# Altium PCB PCB_design.PcbDoc
Units mm, origin at the board's own origin, x right, y up, seen from the top; angles counter-clockwise.
Board outline 16 x 30 mm, 4 copper layers (SIG_TOP, GND, VCC, SIG_BOT), stack 1.586 mm thick; 56 components, 35 nets, 178 pads, 74 vias.
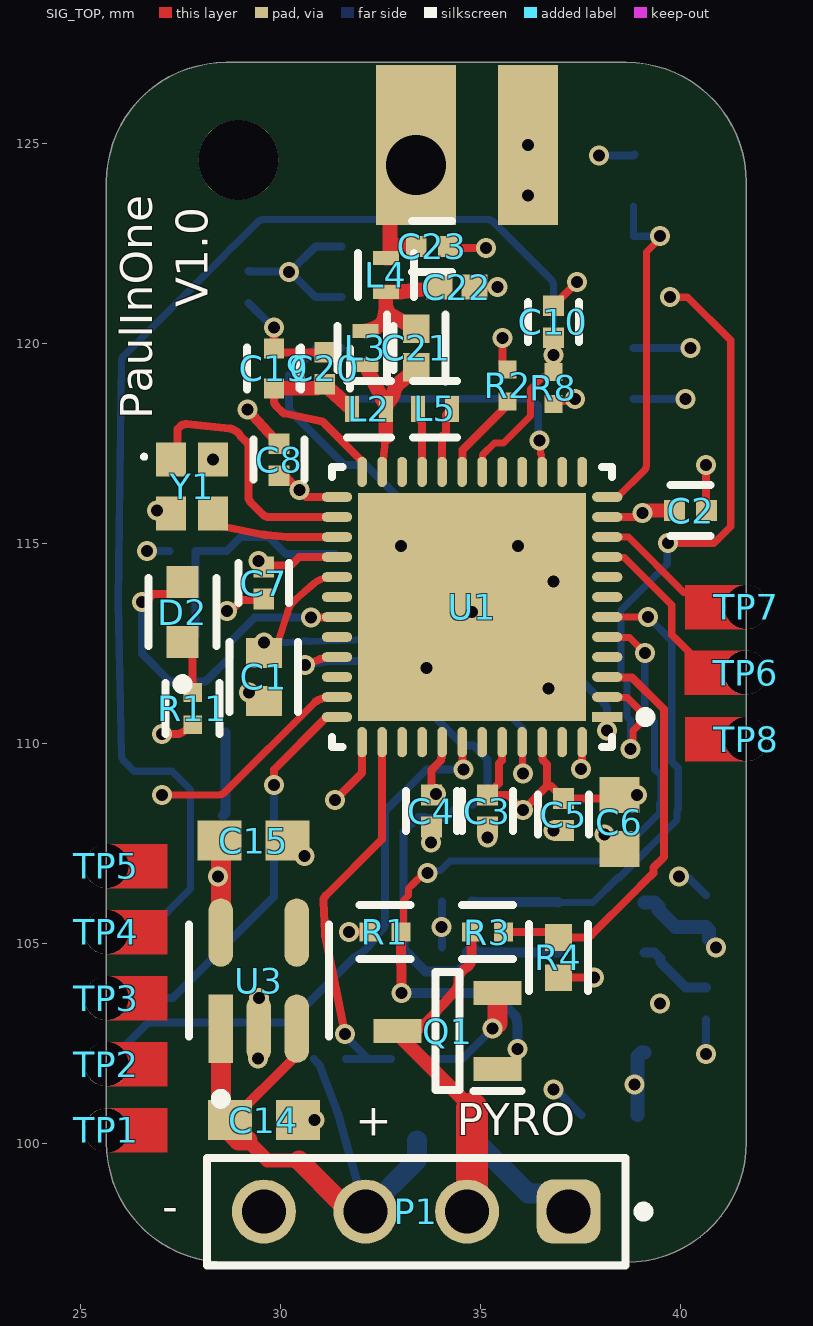
[diagram p0: SIG_TOP view]
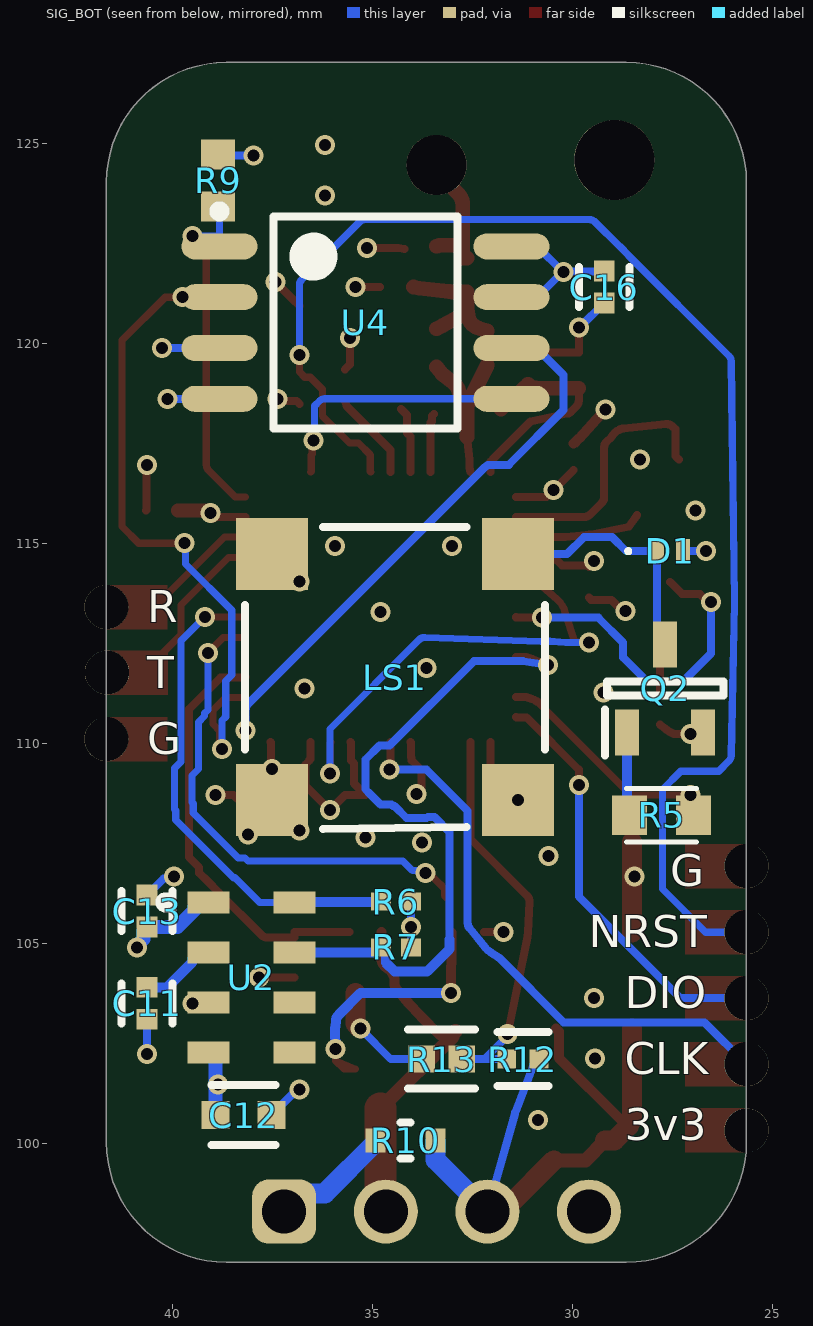
[diagram p1: SIG_BOT view, seen from below]
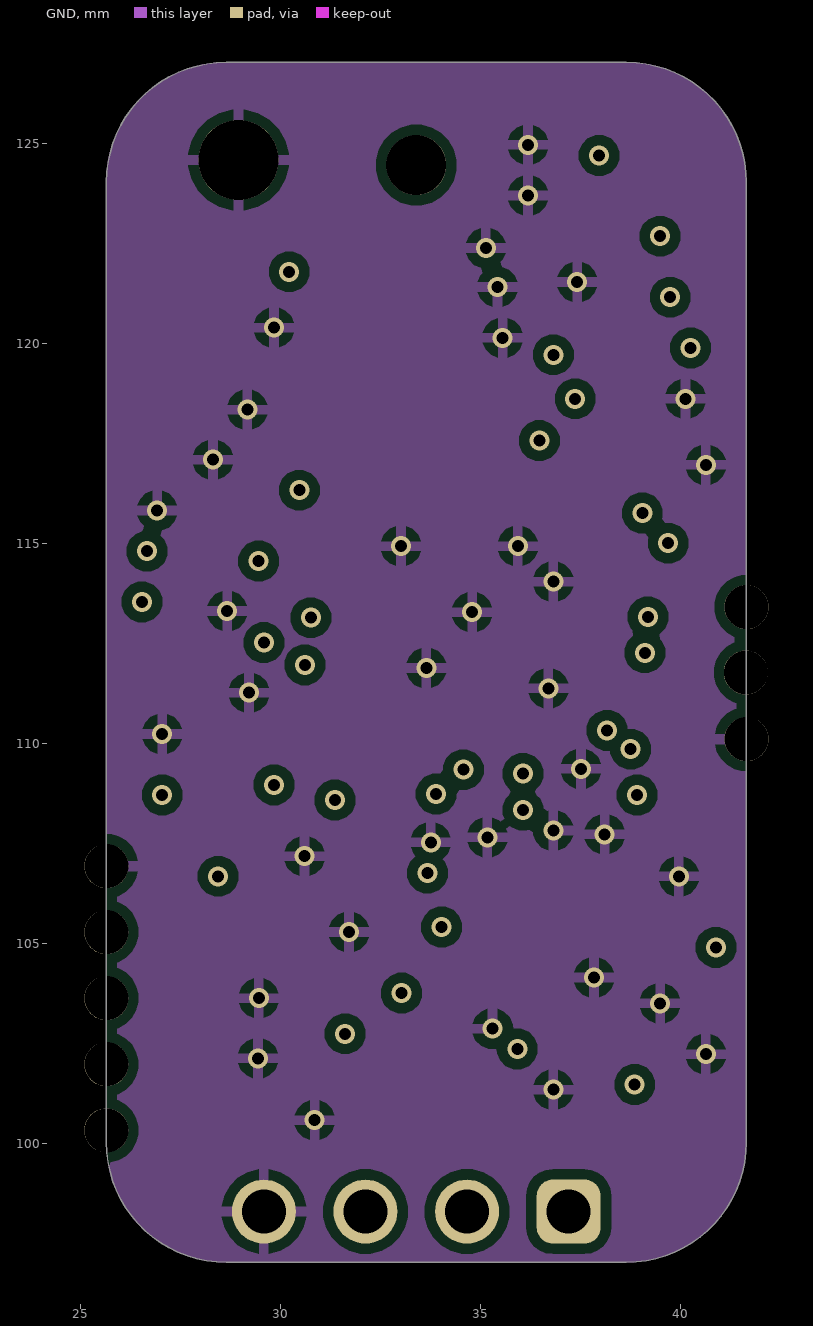
[diagram p2: GND]
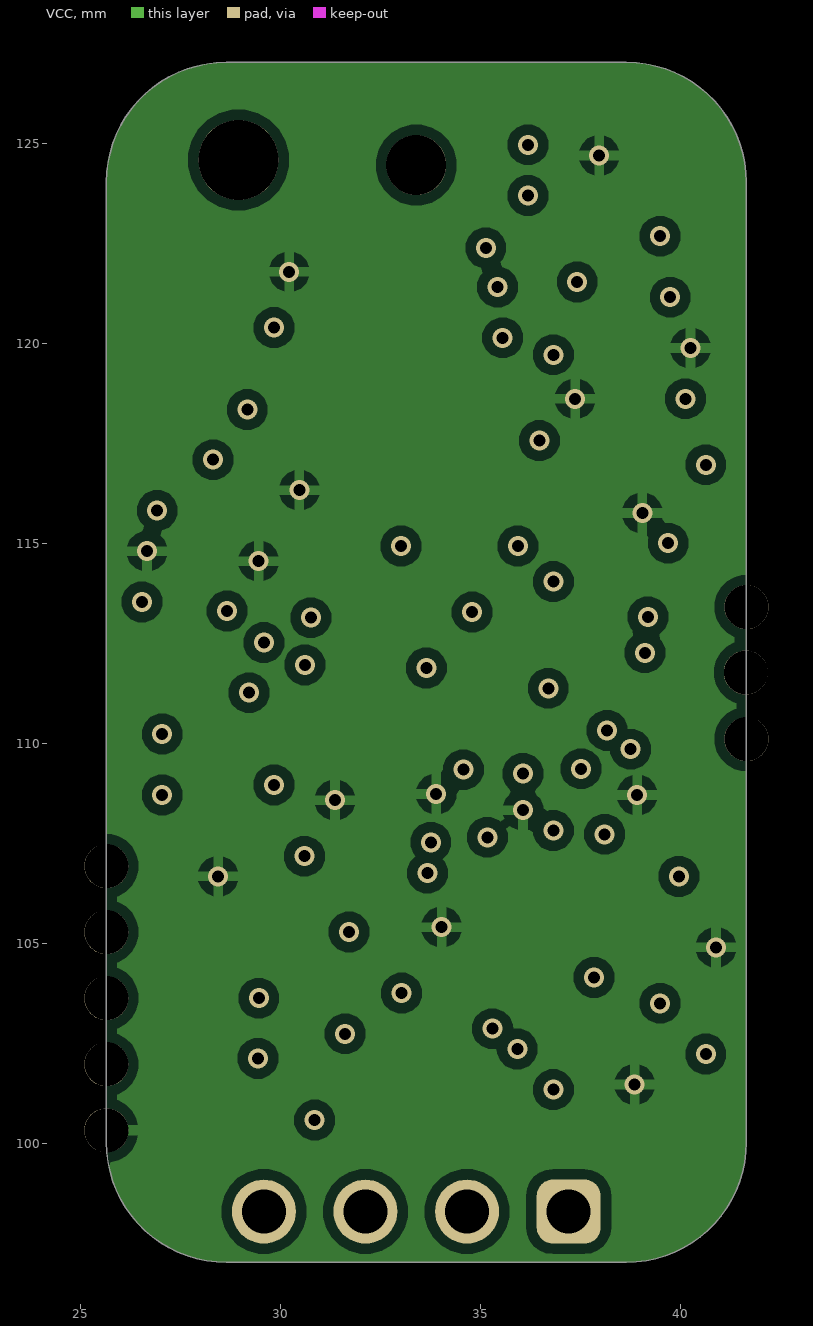
[diagram p3: VCC]
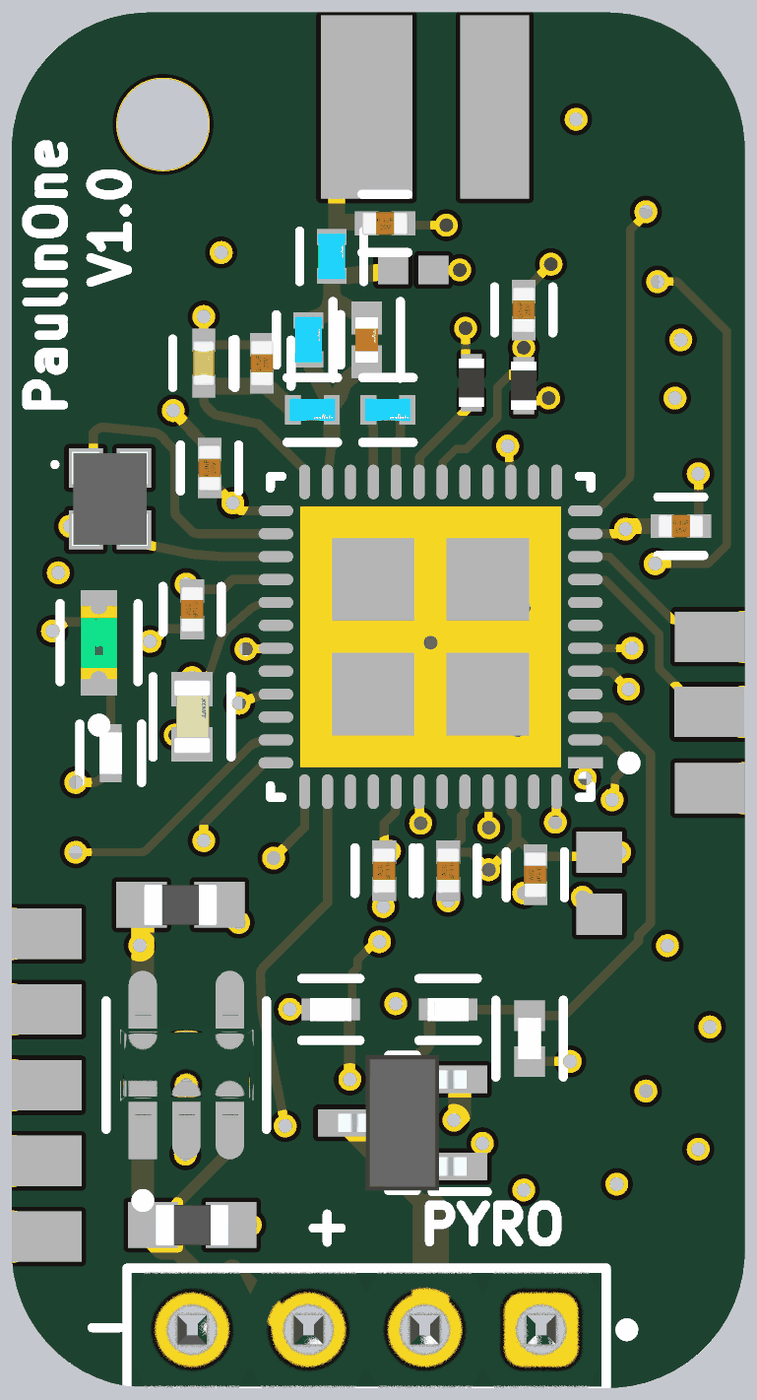
[diagram p4: 3D render of the assembled board from above, using the file's embedded part models]
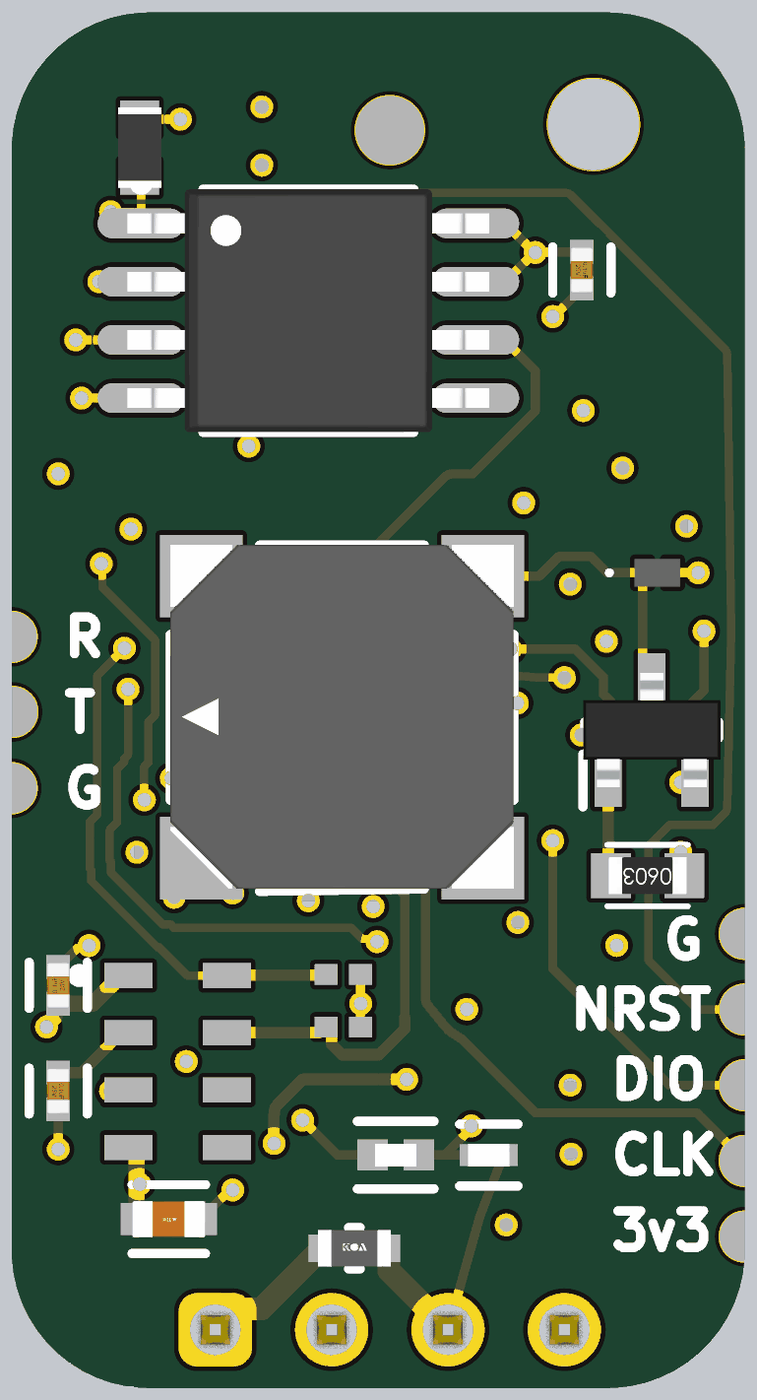
[diagram p5: 3D render of the assembled board from below, using the file's embedded part models]

## Layer stack, top to bottom
Top Solder: solder mask 0.0102, Solder Resist, Dk 3.5
SIG_TOP: signal copper 0.035
Dielectric 2: prepreg 0.2104, PP-006, Dk 4.4
GND: signal copper 0.0152
Dielectric 1: core 1.065, FR-4, Dk 4.6
VCC: signal copper 0.0152
Dielectric 3: prepreg 0.2104, PP-006, Dk 4.4
SIG_BOT: signal copper 0.035
Bottom Solder: solder mask 0.0102, Solder Resist, Dk 3.5

## Board outline
25.654,100.028 25.654,124.028 cw(c28.654,124.028) 28.654,127.028 38.654,127.028 cw(c38.654,124.028) 41.654,124.028 41.654,100.028 cw(c38.654,100.028) 38.654,97.028 28.654,97.028 cw(c28.654,100.028)

## Design rules (kind name [scope] priority, off if disabled: settings)
Clearance [All] p1: gap=0.254 ignorepadtopadclearanceinfootprint=TRUE
PolygonConnect [All] p1: connectstyle=Relief reliefconductorwidth=0.254 reliefentries=4 polygonreliefangle="90 Angle" airgapwidth=0.254
RoutingVias [All] p1: holewidth=0.3 width=0.5 viastyle="Through Hole" minholewidth=0.2 minwidth=0.3 maxholewidth=1 maxwidth=1
SolderMaskExpansion [All] p1: expansion=0.102 istentingtop=FALSE
SupplyNets "Schematic Supply Nets_3" [InNet('GND')] p1: voltage=0.000
SupplyNets "Schematic Supply Nets_1" [InNet('VBAT')] p2: voltage=0.000
SupplyNets "Schematic Supply Nets" [InNet('3v3')] p3: voltage=0.000
Width [All] p1: maxlimit=0.8 minlimit=0.15 preferedwidth=0.2 minimp=50.000000 maximp=50.000000 favimp=50.000000
30 further rules are at their usual default settings.

## Classes and differential pairs
component class MISC: C11 C12 C13 C16 D1 LS1 P1 Q1 Q2 R1 R3 R4 R5 R6 R7 R10 U2 U4
component class board: C1 C2 C3 C4 C5 C6 C7 C8 C10 C14 C15 C19 C20 C21 C22 C23 D2 L2 L3 L4 L5 R2 R8 R9 R11 R12 R13 TP1 TP2 TP3 TP4 TP5 TP6 TP7 TP8 U1 U3 Y1

## Components (designator, comment, footprint, x,y, rotation, side; value= is the part's Value field where it differs from the comment)
C1 "470nF" FP-C0603C-CF-MFG 29.591,111.668 r270 top value="0.47 μF"
C2 "0.1uF" FP-C0402-BB-MFG 40.259,115.824 r0 top value="0.10 μF"
C3 "0.1uF" FP-C0402-BB-MFG 35.179,108.312 r270 top value="0.10 μF"
C4 "0.1uF" FP-C0402-BB-MFG 33.782,108.312 r270 top value="0.10 μF"
C5 "0.1uF" FP-C0402-BB-MFG 37.084,108.223 r270 top value="0.10 μF"
C6 "4.7uF" CAPC1608X87X35NL15T15 38.481,108.037 r90 top
C7 "0.1uF" FP-C0402-BB-MFG 29.591,114.01 r270 top value="0.10 μF"
C8 "0.1uF" FP-C0402-BB-MFG 29.972,117.094 r90 top value="0.10 μF"
C10 "22nF" FP-C0402-BB-MFG 36.83,120.542 r90 top value="22,000 pF"
C11 "0.1uF" FP-C0402-BB-MFG 40.64,103.505 r270 bottom value="0.10 μF"
C12 "10uF" FP-C1608-080-0_1-MFG 38.227,100.711 r0 bottom
C13 "0.1uF" FP-C0402-BB-MFG 40.64,105.81 r90 bottom value="0.10 μF"
C14 "1uF" C0603 29.591,100.584 r180 top
C15 "1uF" C0603 29.337,107.569 r180 top
C16 "0.1uF" FP-C0402-BB-MFG 29.21,121.412 r270 bottom value="0.10 μF"
C19 "47nF" FP-CC0402-MFG 29.845,119.38 r90 top value="47 nF"
C20 "68pF" FP-C0402-BB-MFG 31.115,119.38 r90 top value="68 pF"
C21 "2.7pF" FP-GJM155-0_05-IPC_A 33.401,119.888 r90 top
C22 "15pF" CAPC1005X55X25NL05T10 34.417,121.412 r180 top
C23 "6.8pF" FP-C0402-BB-MFG 33.801,122.428 r0 top value="6.8 pF"
D1 "RB161QS-40T18R" RB161QS40T18R 27.559,114.808 r270 bottom
D2 "LTST-C190GKT" FP-LTST-C190GKT-MFG 27.559,113.284 r90 top
L2 "68nH" FP-LQW15AN_00-W0_5-0_1-MFG 32.214,118.364 r0 top
L3 "10nH" FP-LQW15AN_00-W0_6-0_1-MFG 32.131,119.888 r90 top
L4 "18nH" FP-LQW15AN_00-W0_6-0_1-MFG 32.639,121.71 r90 top
L5 "LQW15AN68NG00D" FP-LQW15AN_00-W0_5-0_1-MFG 33.865,118.364 r0 top
LS1 "CMT-7525-80-SMT-TR" CMT752580SMTTR 34.444,111.635 r0 bottom locked
P1 "61300411121" 61300411121 33.401,98.298 r180 top
Q1 "AO3400A" SOT95P280X125-3N 34.183,102.809 r180 top
Q2 "MMBT3904-TP" SOT95P237X125-3N 27.686,111.379 r90 bottom
R1 "CRCW0402100KFKED" FP-CRCW0402-e3-IPC_C 32.618,105.283 r0 top
R2 "ERJ2RKF1002X" RESC1005X40X25LL05T05 35.687,118.954 r90 top
R3 "CRCW0402100KFKED" FP-CRCW0402-e3-IPC_C 35.179,105.283 r180 top
R4 "CRCW040250K0FKED" FP-CRCW0402-e3-IPC_A 36.957,104.648 r90 top
R5 "ERJ-3EKF2000V" R0603 27.775,108.204 r0 bottom
R6 "RC0402JR-074K7L" RESC1005X40X25LL05T10 34.417,106.045 r180 bottom
R7 "RC0402JR-074K7L" RESC1005X40X25LL05T10 34.417,104.902 r180 bottom
R8 "ERJ2RKF1002X" RESC1005X40X25LL05T05 36.83,118.891 r270 top
R9 "ERJ3EKF1002V" RESC1609X55X30LL15T15 38.862,124.079 r90 bottom
R10 "0R" FP-RK73Z1J-MFG 34.175,100.076 r180 bottom
R11 "330Ω" FP-CRCW0402-e3-IPC_C 27.813,110.871 r90 top
R12 "CRCW0402100KFKED" FP-CRCW0402-e3-IPC_C 31.242,102.108 r180 bottom
R13 "CRCW040250K0FKED" FP-CRCW0402-e3-IPC_A 33.274,102.108 r180 bottom
TP1 "Castellated Hole" "Castellated Hole" 25.654,100.33 r180 top
TP2 "Castellated Hole" "Castellated Hole" 25.654,101.981 r180 top
TP3 "Castellated Hole" "Castellated Hole" 25.654,103.632 r180 top
TP4 "Castellated Hole" "Castellated Hole" 25.654,105.283 r180 top
TP5 "Castellated Hole" "Castellated Hole" 25.654,106.934 r180 top
TP6 "Castellated Hole" "Castellated Hole" 41.64,111.774 r0 top
TP7 "Castellated Hole" "Castellated Hole" 41.656,113.411 r0 top
TP8 "Castellated Hole" "Castellated Hole" 41.656,110.109 r0 top
U1 "STM32WLE5CCU6" FP-UFQFPN48-A0B9-IPC_C 34.798,113.411 r180 top locked
U2 "MPL3115A2" FRES-2153-01_V 38.032,104.15 r180 bottom
U3 "AP2112K-3.3TRG1" FP-SOT25-IPC_A 29.464,104.071 r90 top
U4 "MX25L3233FM2I-08G" MXIC-SOP-8_M 35.179,120.523 r180 bottom
Y1 "ECS-320-10-37B-CKY-TR" ECS3201037BCKYTR 27.796,116.419 r270 top

## Footprints (in the part's own frame and the unit in brackets; to place one, negate y for a bottom-side part, rotate by r counter-clockwise, add the part's x,y. Pads: shape width x height; smd on the part's side, far side on the other; paste and mask are expansions set on the pad)
61300411121 [mm] "Pin Header, pitch 2.54 mm, THT, Vertical, single row, 4p"
  rrect50% 1.6x1.6 hole 1.1: 1(-3.81,0)
  round 1.6 hole 1.1: 2(-1.27,0) 3(1.27,0) 4(3.81,0)
  silkscreen extent -5.8,-1.35 5.23,1.35, body extent -5.08,-1.27 5.08,1.27, height 8.57
C0603 [mm]
  rect 1.1x1 smd: 1(-0.85,0) 2(0.85,0)
  body extent -0.8,-0.44 0.8,0.46, height 0.78
CAPC1005X55X25NL05T10 [mm] "Chip Capacitor, 2-Leads, Body 1.00x0.50mm, IPC Medium Density"
  rect 0.66x0.62 smd: 1(-0.44,0) 2(0.44,0)
  body extent -0.53,-0.28 0.53,0.27, height 0.55
CAPC1608X87X35NL15T15 [mm] "Chip Capacitor, 2-Leads, Body 1.60x0.80mm, IPC Medium Density"
  rect 0.9x1 smd: 1(-0.675,0) 2(0.675,0)
  body extent -0.87,-0.48 0.87,0.47, height 0.87
"Castellated Hole" [mm]
  round 1.1 hole 1.1: 1(0,0)
  SIG_TOP region: -1.524,-0.55 0,-0.55 0,0.55 -1.524,0.55
CMT752580SMTTR [mm]
  rect 1.8x1.8 smd: 1(-3.075,3.05) 2(-3.075,-3.1) 3(3.075,-3.1) 4(3.075,3.05)
  silkscreen extent -3.75,-3.77 3.75,3.77, body extent -3.75,-3.78 3.75,3.72, height 2.5
ECS3201037BCKYTR [mm]
  rect 0.85x0.75 smd: 1(-0.675,-0.525) 2(0.675,-0.525) 3(0.675,0.525) 4(-0.675,0.525)
  silkscreen extent -0.8,-1.25 -0.7,-1.15, body extent -1.02,-0.82 1.02,0.82, height 0.6
FP-C0402-BB-MFG [mm]
  rect 0.52x0.52 smd paste+0 mask+0: 1(-0.4,0) 2(0.4,0)
  silkscreen extent -0.5,-0.64 0.5,0.64, body extent -0.8,-0.4 0.8,0.4, height 0.25
FP-C0603C-CF-MFG [mm]
  rect 0.75x0.9 smd paste+0 mask+0: 1(-0.6,0) 2(0.6,0)
  silkscreen extent -0.87,-0.85 0.88,0.85, body extent -1.2,-0.6 1.2,0.6, height 0.25
FP-C1608-080-0_1-MFG [mm]
  rect 0.7x0.7 smd paste+0 mask+0: 1(-0.7,0) 2(0.7,0)
  silkscreen extent -0.8,-0.75 0.8,0.75, body extent -0.8,-0.4 0.8,0.4, height 0.9
FP-CC0402-MFG [mm]
  rect 0.5x0.5 smd paste+0 mask+0: 1(-0.5,0) 2(0.5,0)
  silkscreen extent -0.53,-0.68 0.53,0.67, body extent -0.87,-0.48 0.87,0.48, height 0.25
FP-CRCW0402-e3-IPC_A [mm]
  rect 0.668x0.672 smd paste+0 mask+0: 1(-0.502,0) 2(0.502,0)
  silkscreen extent -0.84,-0.74 0.84,0.74, body extent -1.04,-0.54 1.04,0.54, height 0.25
FP-CRCW0402-e3-IPC_C [mm]
  rect 0.468x0.472 smd paste+0 mask+0: 1(-0.402,0) 2(0.402,0)
  silkscreen extent -0.64,-0.67 0.64,0.67, body extent -0.74,-0.38 0.74,0.38, height 0.25
FP-GJM155-0_05-IPC_A [mm]
  rect 0.715x0.672 smd paste+0 mask+0: 1(-0.479,0) 2(0.479,0)
  silkscreen extent -0.84,-0.74 0.84,0.74, body extent -1.04,-0.54 1.04,0.54, height 0.25
FP-LQW15AN_00-W0_5-0_1-MFG [mm]
  rect 0.35x0.65 smd paste+0 mask+0: 1(-0.425,0) 2(0.425,0)
  silkscreen extent -0.55,-0.71 0.55,0.7, body extent -0.7,-0.43 0.7,0.43, height 0.25
FP-LQW15AN_00-W0_6-0_1-MFG [mm]
  rect 0.35x0.65 smd paste+0 mask+0: 1(-0.425,0) 2(0.425,0)
  silkscreen extent -0.55,-0.7 0.55,0.7, body extent -0.7,-0.45 0.7,0.45, height 0.25
FP-LTST-C190GKT-MFG [mm]
  rect 0.8x0.8 smd paste+0 mask+0: 1(-0.75,0) 2(0.75,0)
  silkscreen extent -1.92,-0.85 0.85,0.85, body extent -1.25,-0.55 1.25,0.55, height 0.25
FP-RK73Z1J-MFG [mm]
  rect 0.5x0.6 smd paste+0 mask+0: 1(-0.75,0) 2(0.75,0)
  silkscreen extent -0.12,-0.45 0.12,0.45, body extent -0.8,-0.4 0.8,0.4, height 0.55
FP-SOT25-IPC_A [mm]
  rect 1.707x0.616 smd paste+0 mask+0: 1(-1.201,0.95)
  rrect100% 1.707x0.616 smd paste+0 mask+0: 2(-1.201,0) 3(-1.201,-0.95) 4(1.201,-0.95) 5(1.201,0.95)
  silkscreen extent -3.08,-1.75 1.4,1.75, body extent -2.55,-2 2.55,2, height 0.25
FP-UFQFPN48-A0B9-IPC_C [mm]
  rect 0.756x0.242 smd paste+0 mask+0: 1(-3.378,2.75)
  rrect100% 0.756x0.242 smd paste+0 mask+0: 2(-3.378,2.25) 3(-3.378,1.75) 4(-3.378,1.25) 5(-3.378,0.75) 6(-3.378,0.25) 7(-3.378,-0.25) 8(-3.378,-0.75) 9(-3.378,-1.25) 10(-3.378,-1.75) 11(-3.378,-2.25) 12(-3.378,-2.75) 25(3.378,-2.75) 26(3.378,-2.25) 27(3.378,-1.75) 28(3.378,-1.25) 29(3.378,-0.75) 30(3.378,-0.25) 31(3.378,0.25) 32(3.378,0.75) 33(3.378,1.25) 34(3.378,1.75) 35(3.378,2.25) 36(3.378,2.75)
  rrect100% 0.242x0.756 smd paste+0 mask+0: 13(-2.75,-3.378) 14(-2.25,-3.378) 15(-1.75,-3.378) 16(-1.25,-3.378) 17(-0.75,-3.378) 18(-0.25,-3.378) 19(0.25,-3.378) 20(0.75,-3.378) 21(1.25,-3.378) 22(1.75,-3.378) 23(2.25,-3.378) 24(2.75,-3.378) 37(2.75,3.378) 38(2.25,3.378) 39(1.75,3.378) 40(1.25,3.378) 41(0.75,3.378) 42(0.25,3.378) 43(-0.25,3.378) 44(-0.75,3.378) 45(-1.25,3.378) 46(-1.75,3.378) 47(-2.25,3.378) 48(-2.75,3.378)
  rect 5.7x5.7 smd paste-1000 mask+0: 49(0,0)
  silkscreen extent -4.46,-3.5 3.5,3.5
FRES-2153-01_V [mm] "LGA, 8-Leads, Body 5x3mm, Pitch 1.25mm"
  rect 1.05x0.55 smd: 1(-1.075,1.875) 2(-1.075,0.625) 3(-1.075,-0.625) 4(-1.075,-1.875) 5(1.075,-1.875) 6(1.075,-0.625) 7(1.075,0.625) 8(1.075,1.875)
  silkscreen extent -2.28,1.75 -2.03,2, body extent -1.5,-2.5 1.5,2.5, height 1.2
MXIC-SOP-8_M [mm] "SOP, 8-Leads, Body 5.4x5.3mm, Pitch 1.27mm, IPC Low Density"
  oval 1.9x0.65 smd: 1(-3.65,1.905) 2(-3.65,0.635) 3(-3.65,-0.635) 4(-3.65,-1.905) 5(3.65,-1.905) 6(3.65,-0.635) 7(3.65,0.635) 8(3.65,1.905)
  silkscreen extent -3.78,-2.65 2.3,2.9, body extent -3.95,-2.65 3.95,2.65, height 2.16
R0603 [mm] "Resistor, Chip; 0603, .022\" Height"
  rect 0.87x0.98 smd: 1(-0.8,0) 2(0.8,0)
  silkscreen extent -0.88,-0.67 0.88,0.67, body extent -0.85,-0.4 0.85,0.4, height 0.56
RB161QS40T18R [mm]
  rect 0.6x0.35 smd: 1(0,-0.325) 2(0,0.325)
  silkscreen extent -0.05,-1.1 0.05,-1, body extent -0.3,-0.5 0.3,0.5, height 0.34
RESC1005X40X25LL05T05 [mm] "Chip Resistor, 2-Leads, Body 1.05x0.55mm, IPC High Density"
  rect 0.45x0.45 smd: 1(-0.4,0) 2(0.4,0)
  body extent -0.53,-0.28 0.53,0.28, height 0.4
RESC1005X40X25LL05T10 [mm] "Chip Resistor, 2-Leads, Body 1.00x0.50mm, IPC High Density"
  rect 0.5x0.45 smd: 1(-0.375,0) 2(0.375,0)
  body extent -0.53,-0.27 0.53,0.28, height 0.4
RESC1609X55X30LL15T15 [mm] "Chip Resistor, 2-Leads, Body 1.75x0.95mm, IPC High Density"
  rect 0.75x0.85 smd: 1(-0.65,0) 2(0.65,0)
  body extent -0.87,-0.48 0.87,0.48, height 0.55
SOT95P237X125-3N [mm]
  rect 1.15x0.6 smd: 1(-1.1,0.95) 2(-1.1,-0.95) 3(1.1,0)
  silkscreen extent -1.68,-1.46 0.18,1.5, body extent -1.25,-1.5 1.25,1.5, height 1.07
SOT95P280X125-3N [mm]
  rect 1.2x0.6 smd: 1(-1.25,0.95) 2(-1.25,-0.95) 3(1.25,0)
  silkscreen extent -1.85,-1.48 0.3,1.5, body extent -1.4,-1.48 1.4,1.48, height 1.25

## Part data
C1: library part CMP-2006-03235-2, "CAP CER 0.47UF 16V X7R 0603", Capacitance="0.47 μF", Manufacturer=KEMET, Manufacturer Part Number=C0603C474K4RACTU, Package=C0603C-CF, Temperature="-55°C to +125°C", Temperature Characteristic=X7R, Temperature Coefficient=30ppm/°C, Temperature Range High=+125°C, Temperature Range Low=-55°C, Tolerance=0.1, Voltage Rating="16 V", Automotive=Yes, Automotive Grade="Grade 1", Category=Cap, ComponentLink2Description=Datasheet, ComponentLink2URL=https://api.kemet.com/component-edge/download/datasheet/C0603C100J5GACAUTO.pdf, Device Class L1="Passive Components", Device Class L2=Capacitors, Device Class L3="Ceramic Capacitors", Digikey Description="CAP CER 0.47UF 16V X7R 0603", Height=0.87mm, Lead Free=Yes, Material=Ceramic, Mouser Description="0603 C 470nF Ceramic Multilayer Capacitor, 16 V, +125degC, X7R Dielec, +/-10%", Octopart=https://octopart.com/c0603c474k4ractu-kemet-109683, RoHS=TRUE
C2 C3 C4 C5 C7 C8 C11 C13 C16: library part CMP-2008-02046-2, "CAP CER 0.1UF 10V X5R 0402", Capacitance="0.10 μF", Manufacturer=Kemet, Manufacturer Part Number=C0402C104K8PACTU, Package=C0402-BB, Temperature="-55°C to +125°C", Temperature Characteristic=X5R, Temperature Coefficient=15%, Temperature Range High=+125°C, Temperature Range Low=-55°C, Tolerance=0.1, Voltage Rating="10 V", Automotive=No, Category=Cap, ComponentLink2Description=Datasheet, ComponentLink2URL=https://content.kemet.com/datasheets/KEM_C1002_X7R_SMD.pdf, Device Class L1="Passive Components", Device Class L2=Capacitors, Device Class L3="Ceramic Capacitors", Digikey Description="CAP CER 0.1UF 10V X5R 0402", Height=0.55mm, Ipc Land Pattern Name=CAPC10050X50, Lead Free=Yes, Material=Ceramic, Mouser Description="Capacitor 100 nF 10 VDC 0402", Octopart=https://octopart.com/c0402c104k8pactu-kemet-140039, RoHS=TRUE
C6: library part CMP-2006-03238-1, Manufacturer=Kemet, Part Number=C0603C475K8PACTU
C10: library part CMP-2008-03151-2, "CAP CER 0.022UF 50V 10% X7R 0402", Capacitance="22,000 pF", Manufacturer=Kemet, Manufacturer Part Number=C0402C223K5RACTU, Package=C0402-BB, Temperature="-55°C to +125°C", Temperature Characteristic=X7R, Temperature Coefficient=15%, Temperature Range High=+125°C, Temperature Range Low=-55°C, Tolerance=0.1, Voltage Rating="50 V", Automotive=No, Category=Cap, ComponentLink2Description=Datasheet, ComponentLink2URL=https://content.kemet.com/datasheets/KEM_C1002_X7R_SMD.pdf, Device Class L1="Passive Components", Device Class L2=Capacitors, Device Class L3="Ceramic Capacitors", Digikey Description="CAP CER 0.022UF 50V 10% X7R 0402", Height=0.55mm, Ipc Land Pattern Name=CAPC10050X50, Lead Free=Yes, Material=Ceramic, Mouser Description="0402 C 22nF Ceramic Multilayer Capacitor, 50 V, +125degC, X7R Dielectric, +/-10%", Octopart=https://octopart.com/c0402c223k5ractu-kemet-99241, RoHS=TRUE
C12: library part CMP-2000-04979-3, "Multilayer Ceramic Capacitors 10μF ±10% 10V X5R SMD 0603", Case Code (Imperial)=0603, Case Code (Metric)=1608, Dielectric=X5R, Dielectric Material=Ceramic, Max Operating Temperature=85°C, Min Operating Temperature=-55°C, Package Quantity=1, Tolerance=10%, Voltage=10V, Capacitance=10uF, Case/Package=0603, Construction=Flat, Depth=0.8mm, Height=0.8mm, Lead Free="Lead Free", Length=1.6mm, Mount="Surface Mount", Number of Pins=2, Packaging="Tape and Reel", Radiation Hardening=No, REACH SVHC="No SVHC", Resistor Type=Ceramic, RoHS Compliant=Yes, Series=C, Termination=SMD/SMT, Thickness=0.035inch, Voltage Rating=10V, Voltage Rating (DC)=10V, Weight=7.1E-05oz, Width=0.8mm
C14 C15: library part CMP-00121-2, "CAP CER 1UF 50V X7R 0603", Design Item ID=CC0603KRX7R9BB105, Made By="Victor Gutierrez", Source=Capacitors.SchLib
C19: library part CMP-03422-000813-1, "CAP CER 0.047UF 25V X7R 0402", Capacitance="47 nF", Manufacturer=YAGEO, Manufacturer Part Number=CC0402KRX7R8BB473, Package=CC0402, Temperature="-55°C to +125°C", Temperature Characteristic=X7R, Temperature Coefficient=30ppm/°C, Temperature Range High=+125°C, Temperature Range Low=-55°C, Tolerance=0.1, Voltage Rating="25 V", Automotive=No, Automotive Grade=NA, Category=Cap, ComponentLink2Description=Datasheet, ComponentLink2URL=http://www.yageo.com/documents/recent/UPY-GP_NP0_16V-to-50V_16.pdf, Device Class L1="Passive Components", Device Class L2=Capacitors, Device Class L3="Ceramic Capacitors", Digikey Description="CAP CER 0.047UF 25V X7R 0402", Footprint Url=http://www.yageo.com/exep/pages/download/literatures/UPY-C_GEN_24.pdf, Height=0.55mm, Ipc Land Pattern Name=CAPC10050X50, Lead Free=Yes, Material=Ceramic, Mouser Description="Multilayer Ceramic Capacitors MLCC - SMD/SMT 47nF 25V X7R 10%", Octopart=https://octopart.com/cc0402krx7r8bb473-yageo-22850998, RoHS=TRUE
C20: library part CMP-1034-01170-4, "CAP CER 68PF 50V 5% NP0 0402", Capacitance="68 pF", Manufacturer=Kemet, Manufacturer Part Number=C0402C680J5GACTU, Package=C0402-BB, Temperature="-55°C to +125°C", Temperature Characteristic=C0G, Temperature Coefficient=15%, Temperature Range High=+125°C, Temperature Range Low=-55°C, Tolerance=0.05, Voltage Rating="50 V", Automotive=No, Category=Cap, ComponentLink2Description=Datasheet, ComponentLink2URL=https://content.kemet.com/datasheets/KEM_C1002_X7R_SMD.pdf, Device Class L1="Passive Components", Device Class L2=Capacitors, Device Class L3="Ceramic Capacitors", Digikey Description="CAP CER 68PF 50V 5% NP0 0402", Height=0.55mm, Ipc Land Pattern Name=CAPC10050X50, Lead Free=Yes, Material=Ceramic, Mouser Description="Multilayer Ceramic Capacitors MLCC - SMD/SMT 50volts 68pF C0G 5%", Octopart=https://octopart.com/c0402c680j5gactu-kemet-127205, RoHS=TRUE
C21: library part CMP-2008-03840-2, "Multi-Layer Ceramic Capacitor 2.7pF C0G  ±0.1pF 0402 Paper T/R", Case Code (Imperial)=0402, Case Code (Metric)=1005, Dielectric=C0G, Max Operating Temperature=125°C, Min Operating Temperature=-55°C, Package Quantity=10000, Temperature Coefficient=30ppm/°C, Voltage=50V, Capacitance=2.7pF, Case/Package=0402, Depth=0.5mm, Height=0.5mm, Lead Free="Lead Free", Lead Pitch=0.3mm, Length=1mm, Mount="Surface Mount", Number of Pins=2, Packaging="Tape and Reel", Radiation Hardening=No, REACH SVHC="No SVHC", Termination=SMD/SMT, Thickness=0.022inch, Voltage Rating=50V, Voltage Rating (DC)=50V, Width=0.02inch
C22: library part CMP-2008-04267-1, Manufacturer=Murata, Part Number=GRM1555C1H150JZ01D
C23: library part CMP-1034-00517-3, "CAP CER 6.8PF 50V NP0 0402", Capacitance="6.8 pF", Manufacturer=Kemet, Manufacturer Part Number=C0402C689C5GACTU, Package=C0402-BB, Temperature="-55°C to +125°C", Temperature Characteristic=C0G, Temperature Coefficient=15%, Temperature Range High=+125°C, Temperature Range Low=-55°C, Tolerance="0.25 pF", Voltage Rating="50 V", Automotive=No, Category=Cap, ComponentLink2Description=Datasheet, ComponentLink2URL=https://content.kemet.com/datasheets/KEM_C1002_X7R_SMD.pdf, Device Class L1="Passive Components", Device Class L2=Capacitors, Device Class L3="Ceramic Capacitors", Digikey Description="CAP CER 6.8PF 50V NP0 0402", Height=0.55mm, Ipc Land Pattern Name=CAPC10050X50, Lead Free=Yes, Material=Ceramic, Mouser Description="Cap Ceramic 6.8pF 50V C0G 0.25pF SMD 0402 125°C Paper T/R", Octopart=https://octopart.com/c0402c689c5gactu-kemet-9143567, RoHS=TRUE
D1: "Schottky Diode", Manufacturer_Name="ROHM Semiconductor", Mouser Part Number=755-RB161QS-40T18R, Datasheet Link=http://rohmfs.rohm.com/en/products/databook/datasheet/discrete/diode/schottky_barrier/rb161qs-40-e.pdf, Height=0.24mm, Manufacturer_Part_Number=RB161QS-40T18R, Mouser Price/Stock=https://www.mouser.co.uk/ProductDetail/ROHM-Semiconductor/RB161QS-40T18R?qs=r%2Fl4stf1ffr06ghBFd2HSg%3D%3D
D2: library part CMP-22017-000005-2, "LED GREEN CLEAR CHIP SMD", Case Code (Imperial)=0603, Case Code (Metric)=1608, Color=Green, Forward Current=30mA, Forward Voltage=2.1V, Lens Color=Colorless, Max Operating Temperature=85°C, Min Operating Temperature=-55°C, Package Quantity=1, Power Dissipation=100mW, Reverse Voltage=5V, Test Current=10mA, Voltage=2V, Case/Package=0603, Depth=0.8mm, Dominant Wavelength=569nm, Height=0.8mm, Illumination Color=Green, Lead Free="Lead Free", Length=1.6mm, Lens Style=Clear, Lens Transparency=Clear, Luminous Intensity=6mcd, Mount="Surface Mount", Number of Elements=1, Number of LEDs=1, Number of Pins=2, Packaging="Tape and Reel", Power Rating=100mW, Radiation Hardening=No, Viewing Angle=130°, Wavelength=565nm, Width=0.8mm
L2: library part CMP-06042-005746-1, "Wire Wound RF Inductor 68nH ±2% 140mA 1.96Ω 0402 (1005)", Case Code (Imperial)=0402, Case Code (Metric)=1005, Current=570mA, Current Rating=140mA, DC Resistance (DCR)=1.96R, Inductance Tolerance=2%, Max Operating Temperature=125°C, Min Operating Temperature=-55°C, Package Quantity=10000, Self Resonant Frequency=2.5GHz, Test Frequency=100MHz, Case/Package=0402, Core Material=Air, DC Current=140mA, Depth=0.6mm, Height=0.5mm, Inductance=68nH, Lead Free="Lead Free", Length=1mm, Max DC Current=140mA, Military Standard=Not, Mount="Surface Mount", Number of Pins=2, Packaging="Tape and Reel", Q Factor=20, Radiation Hardening=No, REACH SVHC="No SVHC", Shielding=Unshielded, Termination=SMD/SMT, Tolerance=2%, Weight=2.8E-05oz, Width=0.5mm
L3: library part CMP-06042-002082-1, "Wire Wound RF Inductor 10nH ±2% 500mA 0.17Ω 0402 (1005)", Case Code (Imperial)=0402, Case Code (Metric)=1005, Current=370mA, Current Rating=500mA, DC Resistance (DCR)=170mR, Inductance Tolerance=2%, Max Operating Temperature=125°C, Min Operating Temperature=-55°C, Package Quantity=10000, Resistor Type=Wirewound, Self Resonant Frequency=5.5GHz, Test Frequency=100MHz, Case/Package=0402, Core Material=Non-Magnetic, DC Current=500mA, Depth=0.7mm, Height=0.5mm, Height - Seated (Max)=0.024inch, Inductance=10nH, Lead Free="Lead Free", Length=1mm, Max DC Current=500mA, Military Standard=Not, Mount="Surface Mount", Number of Pins=2, Packaging="Tape and Reel", Radiation Hardening=No, REACH SVHC="No SVHC", Shielding=Unshielded, Termination=SMD/SMT, Tolerance=2%, Weight=2.8E-05oz, Width=0.02inch
L4: library part CMP-06042-006916-1, "Wire Wound RF Inductor 18nH ±5% 370mA 0.27Ω 0402 (1005)", Case Code (Imperial)=0402, Case Code (Metric)=1005, Current Rating=370mA, DC Resistance (DCR)=270mR, Max Operating Temperature=125°C, Min Operating Temperature=-55°C, Package Quantity=10000, Resistor Type=Wirewound, Self Resonant Frequency=4.5GHz, Test Frequency=100MHz, Tolerance=5%, Case/Package=0402, Core Material=Air, DC Current=370mA, Depth=0.7mm, Height=0.5mm, Inductance=18nH, Lead Free="Lead Free", Length=1mm, Max DC Current=370mA, Military Standard=Not, Mount="Surface Mount", Packaging="Tape and Reel", Q Factor=25, Radiation Hardening=No, Shielding=Unshielded, Termination=SMD/SMT, Weight=2.8E-05oz, Width=0.02inch
L5: library part CMP-06042-005746-1, "Wire Wound RF Inductor 68nH ±2% 140mA 1.96Ω 0402 (1005)", Case Code (Imperial)=0402, Case Code (Metric)=1005, Current=570mA, Current Rating=140mA, DC Resistance (DCR)=1.96R, Inductance=68nH, Inductance Tolerance=2%, Max Operating Temperature=125°C, Min Operating Temperature=-55°C, Package Quantity=10000, Self Resonant Frequency=2.5GHz, Test Frequency=100MHz, Case/Package=0402, Core Material=Air, DC Current=140mA, Depth=0.6mm, Height=0.5mm, Lead Free="Lead Free", Length=1mm, Max DC Current=140mA, Military Standard=Not, Mount="Surface Mount", Number of Pins=2, Packaging="Tape and Reel", Q Factor=20, Radiation Hardening=No, REACH SVHC="No SVHC", Shielding=Unshielded, Termination=SMD/SMT, Tolerance=2%, Weight=2.8E-05oz, Width=0.5mm
LS1: "Loudspeaker or Buzzer", Manufacturer_Name="CUI Devices", Mouser Part Number=490-CMT-7525-80SMTTR, Arrow Part Number=CMT-7525-80-SMT-TR, Arrow Price/Stock=https://www.arrow.com/en/products/cmt-7525-80-smt-tr/cui-devices?region=nac, Datasheet Link=https://www.cuidevices.com/product/resource/cmt-7525-80-smt-tr.pdf, Height=2.7mm, Manufacturer_Part_Number=CMT-7525-80-SMT-TR, Mouser Price/Stock=https://www.mouser.co.uk/ProductDetail/CUI-Devices/CMT-7525-80-SMT-TR?qs=P1JMDcb91o5izP7Xira9ww%3D%3D
P1: library part CMP-1502-01064-3, Color=Black, Contact Resistance=20mΩ, Current Rating=3A, Max Operating Temperature=105°C, Min Operating Temperature=-40°C, Operating Supply Voltage=250V, Connector Type="Male Pin", Contact Material=Copper, Contact Mating Length=5.9944mm, Contact Plating=Gold, Gender=Male, Height=8.89mm, Lead Free="Lead Free", Lead Pitch=2.54mm, Mount="Through Hole", NexarPartId=32855522, Number of Contacts=4, Number of Pins=4, Number of Positions=4, Number of Rows=1, Orientation=Vertical, Packaging=Bulk, Pitch=2.54mm, REACH SVHC=Unknown, RoHS=Compliant, Termination=Solder, Voltage Rating=250V
Q1: "MOSFET (N-Channel)", Manufacturer_Name="Alpha & Omega Semiconductors", Arrow Part Number=AO3400A, Arrow Price/Stock=https://www.arrow.com/en/products/ao3400a/alpha-and-omega-semiconductor?utm_currency=USD&region=nac, Datasheet Link=http://aosmd.com/res/data_sheets/AO3400A.pdf, Height=1.25mm, Manufacturer_Part_Number=AO3400A
Q2: "Transistor BJT NPN", Manufacturer_Name=MCC, Mouser Part Number=833-MMBT3904-TP, Arrow Part Number=MMBT3904-TP, Arrow Price/Stock=https://www.arrow.com/en/products/mmbt3904-tp/micro-commercial-components?region=nac, Datasheet Link=https://mccsemi.com/pdf/Products/MMBT3904(SOT-23).pdf, Height=1.25mm, Manufacturer_Part_Number=MMBT3904-TP, Mouser Price/Stock=https://www.mouser.co.uk/ProductDetail/Micro-Commercial-Components-MCC/MMBT3904-TP?qs=KFo7JewZbUHicjDjIayULQ%3D%3D
R1 R3 R12: library part CMP-2002-08123-3, "RES Thick Film, 100kΩ, 1%, 0.063W, 100ppm/°C, 0402", Case Code (Imperial)=0402, Case Code (Metric)=1005, Max Operating Temperature=155°C, Max Power Dissipation=63mW, Min Operating Temperature=-55°C, Package Quantity=10000, Resistance=100kR, Temperature Coefficient=100ppm/°C, Tolerance=1%, Voltage Rating=50V, Case/Package=0402, Composition="Thick Film", Contact Plating=Tin, Depth=0.5mm, Features="Automotive AEC-Q200", Height=0.35mm, Lead Free="Lead Free", Length=1mm, Military Standard=Not, Mount="Surface Mount", Number of Pins=2, Number of Terminations=2, Packaging="Tape and Reel", Power Rating=63mW, Radiation Hardening=No, Termination=SMD/SMT, Voltage Rating (DC)=50V, Weight=2.3E-05oz, Width=0.02inch
R2 R8: library part CMP-2000-07588-1, "Chip Resistor, 10 KOhm, +/- 1%, 0.1 W, -55 to 155 degC, 0402 (1005 Metric), RoHS, Tape and Reel", Case Code (Imperial)=0402, Case Code (Metric)=1005, Manufacturer=Panasonic, Max Operating Temperature=155degC, Max Power Dissipation=100mW, Min Operating Temperature=-55degC, Package Description="2-Pin Surface Mount Device, Body 1 x 0.5 mm", Package Quantity=1, Package Reference=402, Resistance=10KOhm, Temperature Coefficient=100ppm\/degreesC, Tolerance=1%, Voltage Rating=50V, Case\/Package=0402, Composition=ThickFilm, Contact Plating=Tin, Datasheet URL=https://industrial.panasonic.com/cdbs/www-data/pdf/RDA0000/AOA0000C304.pdf, Datasheet Version=02/2017, Depth=0.5mm, Height=0.35mm, Lead Free=LeadFree, Length=1mm, Manufacturer URL=http://www.panasonic.com/, Military Standard=Not, Mount=SurfaceMount, Mounting Technology=SurfaceMount, Number of Pins=2, Number of Terminations=2, Packaging=TapeandReel, Power Rating=100mW, Radiation Hardening=No, REACH SVHC=NoSVHC, RoHSCompliant=True, Termination=SMD/SMT, Voltage Rating (DC)=50V, Width=0.02inch
R4 R13: library part CMP-02407-005152-1, "RES Thick Film, 50kΩ, 1%, 0.063W, 100ppm/°C, 0402", Case Code (Imperial)=0402, Case Code (Metric)=1005, Max Operating Temperature=155°C, Min Operating Temperature=-55°C, Package Quantity=10000, Power Rating=63mW, Resistance=50kR, Tolerance=1%, Voltage Rating=50V, Case/Package=0402, Height=0.35mm, Lead Free="Lead Free", Length=1mm, Packaging="Tape and Reel", Termination=SMD/SMT, Weight=2.3E-05oz, Width=0.5mm
R5: library part CMP-024-000031-1, "200 OHM 1% 1/10W 0603", Design Item ID=ERJ-3EKF2000V, Made By="Brennan Swanton", Source=Resistors.SchLib
R6 R7: library part CMP-2002-08011-1, Manufacturer="Yageo / Phycomp", Part Number=RC0402JR-074K7L
R9: library part CMP-1012-00623-3, "Chip Resistor, 10 KOhm, +/- 1%, 0.1 W, -55 to 155 degC, 0603 (1608 Metric), RoHS, Tape and Reel", Case Code (Imperial)=0603, Case Code (Metric)=1608, Manufacturer=Panasonic, Max Operating Temperature=155degC, Max Power Dissipation=100mW, Min Operating Temperature=-55degC, Package Description="2-Pin Surface Mount Device, Body 1.6 x 0.85 mm", Package Quantity=1, Package Reference=603, Resistance=10KOhm, Temperature Coefficient=100ppm\/degreesC, Tolerance=1%, Voltage Rating=75V, Case\/Package=0603, Composition=ThickFilm, Contact Plating=Tin, Datasheet URL=https://industrial.panasonic.com/cdbs/www-data/pdf/RDA0000/AOA0000C304.pdf, Datasheet Version=02/2017, Depth=0.8mm, Height=0.45mm, Lead Free=LeadFree, Length=1.6mm, Manufacturer URL=http://www.panasonic.com/, Military Standard=Not, Mount=SurfaceMount, Mounting Technology=SurfaceMount, Number of Pins=2, Number of Terminations=2, Packaging=TapeandReel, Power Rating=100mW, Radiation Hardening=No, REACH SVHC=NoSVHC, RoHSCompliant=true, Termination=SMD/SMT, Voltage Rating (DC)=75V, Width=0.031inch
R10: library part CMP-2000-01769-2, "RES 0 OHM JUMPER 0603", Case Code (Imperial)=0603, Case Code (Metric)=1608, Max Operating Temperature=155°C, Min Operating Temperature=-55°C, Package Quantity=5000, Power Rating=1W, Resistance=0mR, Resistor Type="Thick Film", Temperature Coefficient=400ppm/°C, Tolerance=1%, Case/Package=0603, Construction=Rectangular, Depth=0.8mm, Height=0.45mm, Lead Free="Lead Free", Length=1.6mm, Military Standard=Not, Packaging="Tape and Reel", RoHS Compliant=Yes, Series=RK73Z, Termination=SMD/SMT, Width=0.8mm
R11: library part CMP-2002-08122-2, "RES Thick Film, 0Ω, 0.063W, 0402", Case Code (Imperial)=0402, Case Code (Metric)=1005, Max Operating Temperature=155°C, Max Power Dissipation=63mW, Min Operating Temperature=-55°C, Package Quantity=1, Resistance=0mR, Temperature Coefficient=100ppm/°C, Tolerance=5%, Voltage Rating=50V, Case/Package=0402, Composition="Thick Film", Contact Plating=Tin, Depth=0.5mm, Features="Automotive AEC-Q200", Height=0.35mm, Lead Free="Lead Free", Length=1mm, Military Standard=Not, Mount="Surface Mount", Number of Terminations=2, Packaging="Tape and Reel", Power Rating=63mW, Radiation Hardening=No, Termination=SMD/SMT, Voltage Rating (DC)=50V, Weight=2.3E-05oz, Width=0.5mm
TP1 TP2 TP3 TP4 TP5 TP6 TP7 TP8: library part CMP-00124-3, "Castellated Hole, 1 connection"
U1: library part CMP-12105-000100-1, "MULTIPROTOCOL LPWAN 32-BIT ARM C"
U2: library part CMP-1261-00002-2, "Xtrinsic I2C Precision Altimeter, 1.95 to 3.6 V, -40 to 85 degC, 8-Pin LGA (2153-01), RoHS, Tray", Manufacturer="Freescale Semiconductor", Operating Temperature Range="-40 to 85 degC", ComponentLink1Description="Manufacturer URL", ComponentLink1URL=http://www.freescale.com/, ComponentLink2Description=Datasheet, ComponentLink2URL=http://cache.freescale.com/files/sensors/doc/data_sheet/MPL3115A2.pdf, ComponentLink3Description="Package Specification", ComponentLink3URL=http://cache.freescale.com/files/shared/doc/package_info/98ASA00260D.pdf, DatasheetVersion="Rev. 3.0", fSCL@20 pF="4 MHz Max.", fSCL@400 pF="400 KHz Max.", Mounting Technology="Surface Mount", PackageDescription="8-Pin Land Grid Array, Body 5 x 3 mm, Pitch 1.25 mm", PackageVersion="Rev. O", Packing=Tray, PartNumber=MPL3115A2, RoHS=TRUE, VDD="1.95 to 3.6 V", VDDIO="1.62 to 3.6 V"
U3: library part CMP-12756-000035-1, "IC REG LINEAR 3.3V 600MA SOT25", Case/Package=SOT-23-5, Dropout Voltage=250mV, Max Input Voltage=6V, Max Operating Temperature=85°C, Max Output Current=600mA, Min Input Voltage=2.5V, Min Operating Temperature=-40°C, Output Voltage=3.3V, Package Quantity=1, Quiescent Current=55uA, Accuracy=1.5%, Height=1.3mm, Lead Free="Lead Free", Length=3.1mm, Mount="Surface Mount", Number of Outputs=1, Number of Pins=5, Number of Regulators=1, Output Current=600mA, Output Type=Fixed, Packaging="Tape and Reel", Polarity=Positive, Width=1.7mm
U4: library part CMP-2000-05278-1, "CMOS MXSMIO(R) (Serial Multi I/O) Flash Memory, 32 Mbits (x1/x2/x4), 3 V, -40 to 85 degC, 8-Pin SOP", Manufacturer=Macronix, Package Description="8-Pin Small Outline Package, Body 5.23 x 5.28 mm, Pitch 1.27 mm", Package Reference=SOP-8, Datasheet URL=http://datasheet.octopart.com/MX25L3233FM2I-08G-Macronix-datasheet-38883555.pdf, Datasheet Version="Rev. 1.1, 01/2015", Manufacturer URL=http://www.macronix.com
Y1: "Crystal or Oscillator", Manufacturer_Name=ECS, Mouser Part Number=520-320-10-37B-CKYT, Arrow Part Number=ECS-320-10-37B-CKY-TR, Arrow Price/Stock=https://www.arrow.com/en/products/ecs-320-10-37b-cky-tr/ecs-international?region=nac, Datasheet Link=https://ecsxtal.com/store/pdf/ECX-1637B.pdf, Height=0.5mm, Manufacturer_Part_Number=ECS-320-10-37B-CKY-TR, Mouser Price/Stock=https://www.mouser.co.uk/ProductDetail/ECS/ECS-320-10-37B-CKY-TR?qs=l7cgNqFNU1gltxVt%2FwcX%252Bw%3D%3D

## Free pads (board coordinates)
  round 1.5 hole 1.5: 30(33.401,124.46)
  rect 2x4 smd: 31(33.401,124.968)
  rect 1.5x4 smd: 31(36.195,124.968)
  round 2 hole 2: 33(28.956,124.587)

## Via types
v1: diameter 0.5, hole 0.3, SIG_TOP to SIG_BOT, 74 vias

## Nets (pads, with @x,y where several pads share a name; then routed paths per layer and width w, separated by ;. In a path a pad name is that pad's centre, name@x,y a point inside that pad or via, vN(x,y) a via of type N, cw(c..) or ccw(c..) an arc to the next point about the centre after c; other vN are vias at no path point)
3v3: C2.1 C3.1 C4.1 C5.1 C6.2 C7.1 C8.1 C12.2 C13.1 C15.2 C16.1 D1.2 LS1.1 R6.2 R7.2 R8.2 R9.2 TP1.1 U1.11 U1.25 U1.28 U1.37 U1.41 U1.44 U1.46 U2.1 U2.4 U3.5 U4.3 U4.7 U4.8 | length 31
  SIG_TOP w0.2: v1(29.461,114.56) 29.461,114.54 C7.1 29.627,114.446 30.26,114.446 30.475,114.661 U1.28 ; C8.1@29.972,116.84 v1(30.48,116.332) 30.651,116.161 U1.25 ; v1(31.369,108.585) 32.048,109.264 U1.37 ; v1(33.898,108.736) 33.782,108.853 33.782,109.338 34.023,109.579 34.023,109.642 34.04,109.659 34.04,110.025 U1.41 ; U1.44 35.54,110.025 35.54,109.58 35.464,109.504 35.464,108.997 C3.1 35.687,108.712 v1(36.068,108.331) 36.672,108.935 ; U1.46 36.556,110.025 36.556,109.614 36.573,109.597 36.573,109.579 36.672,109.48 36.672,108.935 ; R8.2 36.9,118.561 37.318,118.561 v1(37.375,118.618) ; U1.11 38.953,115.661 v1@38.989,115.697 ; v1(38.923,108.712) C6.2 38.392,108.623 C5.1 36.772,108.935 36.672,108.935
  SIG_TOP w0.25: C15.2 C15.2@28.514,107.542
  SIG_TOP w0.35: v1@38.989,115.697 39.116,115.824 C2.1
  SIG_TOP w0.5: U3.5 C15.2@28.514,107.542
  SIG_BOT w0.2: v1(26.67,114.808) D1.2 ; C16.1 29.219,121.802 30.217,121.802 v1(30.226,121.793) v1@30.247,121.793 ; U4.7 30.882,121.158 v1@30.247,121.793 ; U4.8 30.882,122.428 v1@30.247,121.793 ; R7.2 34.039,104.905 34.039,105.407 v1(34.036,105.41) 34.039,105.413 34.039,106.042 R6.2 ; v1(37.973,124.699) 38.832,124.699 R9.2 ; U4.3 v1(40.259,119.888)
  SIG_BOT w0.35: C12.2 38.927,102.175 39.027,102.275 U2.4 ; U2.1 39.357,106.025 39.457,105.925 39.457,105.832 39.879,105.41 C13.1 40.725,105.325 40.725,105.112 40.894,104.943 v1(40.894,104.902)
  other v1: 38.862,101.473 28.448,106.68 39.052,115.76
antenna: C23.1 L4.2 pad.30 pad.31@33.401,124.968 | length 3.8
  SIG_TOP w0.369: L4.2 32.738,122.135 32.747,122.144 32.747,122.456 ; C23.1 33.325,122.456 32.747,122.456 ; pad.31@33.401,124.968 pad.30 cw(c33.032,124.46) 33.3,124.206 32.848,123.73 ccw(c33.116,123.476) 32.747,123.476 32.747,122.456
BAR_SCL: R6.1 U1.6 U2.8 | length 12.4
  SIG_TOP w0.18: U1.6 U1.6 39.193,113.162 v1(39.194,113.163)
  SIG_BOT w0.18: U2.8 37.821,106.025 38.44,106.644 38.478,106.644 39.919,108.085 39.919,108.321 39.951,108.353 39.951,109.38 39.788,109.543 39.788,112.569 v1(39.194,113.163)
  SIG_BOT w0.25: R6.1 34.802,106.035 36.947,106.035 U2.8
BAR_SDA: R7.1 U1.33 U2.7 | length 17.2
  SIG_TOP w0.2: v1(30.617,111.965) 30.998,112.107 cw(c31.163,111.661) 31.015,112.113 31.163,112.161 U1.33
  SIG_BOT w0.2: v1(30.617,111.965) 31.238,112.056 cw(c31.267,111.858) 31.267,112.058 32.468,112.058 34.577,109.949 34.83,109.949 35.184,109.595 35.184,108.858 35.067,108.741 34.804,108.478 34.529,108.478 34.49,108.439 34.455,108.439 34.149,108.132 33.648,108.132 33.621,108.159 33.455,108.159 33.077,107.781 33.077,105.099
  SIG_BOT w0.25: 33.077,105.099 33.077,104.856 33.635,104.298 34.449,104.298 34.671,104.52 34.671,104.802 34.771,104.902 R7.1 34.817,104.902 34.944,104.775 35.95,104.775 U2.7
BAT_VAL: R12.1 R13.2 U1.38 | length 9.9
  SIG_TOP w0.2: 31.114,105.273 ccw(c31.314,105.282) 31.116,105.252 31.125,105.195 ccw(c31.722,105.288) 31.13,105.167 v1(31.623,102.743) ; 31.114,105.274 31.08,106.045 cw(c31.28,106.054) 31.138,106.195 32.548,107.605 U1.38
  SIG_BOT w0.2: v1(31.623,102.743) 31.623,102.693 32.208,102.108 ; R12.1 32.208,102.108 ; R13.2 32.208,102.108
BUZZER: R5.1 U1.35 | length 5.3
  SIG_TOP w0.18: v1@27.054,108.715 28.475,108.715 ccw(c28.475,108.895) 28.601,108.767 30.88,111.046
  SIG_TOP w0.2: 30.88,111.046 ccw(c30.841,111.139) 30.897,111.055 cw(c31.163,110.661) 31.015,111.113 31.163,111.161 U1.35
  other v1: 27.051,108.712
CONTINUITY: R3.1 R4.2 U1.3 | length 10.4
  SIG_TOP w0.2: R3.1 R4.2@36.957,105.283 ; R4.2 37.637,105.15 ccw(c37.637,105.35) 37.778,105.208 38.853,106.283 39.128,106.559 39.335,106.765 39.335,106.899 39.593,107.157 39.593,110.858 38.798,111.653 38.184,111.653 U1.3
GND: C1.2 C2.2 C3.2 C4.2 C5.2 C6.1 C7.2 C8.2 C10.2 C11.2 C12.1 C13.2 C14.1 C15.1 C16.2 C19.2 C20.2 C22.1 C23.2 LS1.3 LS1.4 P1.4 pad.31@36.195,124.968 pad.33 Q1.2 Q2.2 R1.1 R2.2 R4.1 R11.1 R13.1 TP5.1 TP8.1 U1.48 U1.49 U2.3 U3.2 U4.4 Y1.2 Y1.4 | length 19.1
  SIG_TOP w0.2: v1(27.051,110.236) 27.429,110.236 ccw(c27.429,110.436) 27.543,110.271 27.677,110.363 R11.1 ; v1(28.673,113.313) 28.754,113.313 29.031,113.589 29.534,113.589 C7.2@29.591,113.646 ; v1(29.845,120.396) C19.2 29.845,119.78 C20.2 ; v1(31.722,105.288) 32.082,105.288 R1.1 ; C23.2@34.201,122.366 34.361,122.389 v1(35.14,122.389) ; C22.1@34.817,121.412 C22.1 v1(35.433,121.412) ; v1(35.56,120.142) 35.56,119.597 35.562,119.595 35.562,119.48 R2.2 ; C10.2 36.99,121.102 v1(37.424,121.539) ; R4.1 36.961,104.15 v1(37.845,104.15) ; v1(37.52,109.367) 37.54,109.386 37.54,110.025 U1.48 ; v1(40.64,116.967) 40.649,116.958 40.649,115.833 C2.2
  SIG_TOP w0.25: v1(29.178,118.347) 29.837,117.629 C8.2
  SIG_TOP w0.5: v1(35.306,102.87) 35.433,102.997 Q1.2
  SIG_BOT w0.2: C16.2 29.826,120.396 v1(29.845,120.396) ; R13.1 34.544,102.108 v1(35.306,102.87) ; v1(36.83,101.346) 36.892,101.346 C12.1 ; U4.4 v1(40.132,118.618) ; v1(39.967,106.677) 40.024,106.619 40.231,106.619 C13.2 ; v1(40.64,102.235) C11.2
  other v1: 30.861,100.584 29.445,102.127 39.497,103.505 29.464,103.632 30.607,107.181 33.764,107.528 35.179,107.655 38.111,107.73 36.83,107.823 29.222,111.269 36.703,111.379 33.655,111.887 34.798,113.284 36.83,114.046 33.02,114.935 35.941,114.935 26.924,115.824 28.321,117.094 36.195,123.698 36.195,124.968
IGNITE: Q1.1 R1.2 U1.5 | length 20.4
  SIG_TOP w0.18: R1.2 33.086,105.349 33.086,106.077 33.206,106.197 33.206,106.374 33.312,106.479 33.594,106.762 v1(33.681,106.762) ; v1(35.928,102.362) Q1.1@35.928,102.069 ; U1.5 38.188,112.649 38.735,112.649 v1(39.116,112.268) ; Q1.1@35.928,102.069 35.718,101.859 Q1.1 Q1.1@35.928,102.069
  SIG_TOP w0.25: R1.2@33.023,105.28 33.023,105.172 v1(33.034,103.759)
  SIG_BOT w0.18: v1(33.681,106.762) 33.742,106.823 34.006,106.823 34.244,107.061 38.112,107.061 38.187,107.136 38.357,107.136 39.485,108.265 39.485,108.501 39.517,108.533 39.517,109.2 39.354,109.363 39.354,110.531 39.2,110.685 39.2,110.754 39.116,110.838 v1(39.116,112.268)
  SIG_BOT w0.25: v1(33.034,103.759) 35.307,103.759 35.848,103.217 cw(c35.672,103.04) 35.921,103.062 35.933,102.925 cw(c35.306,102.87) 35.935,102.861 v1(35.928,102.362)
LED: D2.2 U1.31 | length 8.6
  SIG_TOP w0.2: v1(26.543,113.538) 26.624,113.538 26.82,113.734 27.259,113.734 D2.2 ; v1(30.766,113.144) 30.775,113.153 31.412,113.153 U1.31
  SIG_BOT w0.2: v1(26.543,113.538) 26.543,112.246 27.239,111.55 28.133,111.55 28.737,112.154 28.737,112.522 29.359,113.144 v1(30.766,113.144)
MISO: U1.2 U4.2 | length 16.1
  SIG_TOP w0.18: U1.2 38.188,111.149 38.674,111.149 38.989,110.834 38.989,110.488 38.821,110.32 38.821,109.917 v1(38.76,109.856) ; v1(39.699,115.006) 40.848,115.006 41.263,115.422 41.263,120.08 40.185,121.158 v1(39.751,121.158)
  SIG_BOT w0.18: v1(38.76,109.856) 38.766,109.862 38.766,110.574 38.671,110.67 38.671,111.563 38.522,111.712 38.522,113.331 39.677,114.486 39.677,114.984 v1(39.699,115.006)
MOSI: U1.15 U4.5 | length 6.7
  SIG_TOP w0.18: v1(36.48,117.571) 36.51,117.541 36.51,117.242 36.536,117.216 36.536,116.801 U1.15
  SIG_BOT w0.18: U4.5 36.198,118.618 cw(c36.198,118.438) 36.326,118.565 36.449,118.442 36.449,117.602 v1(36.48,117.571)
NCS: R9.1 U1.12 U4.1 | length 8.6
  SIG_TOP w0.18: U1.12 38.433,116.161 39.104,116.832 ccw(c38.977,116.96) 39.157,116.96 39.157,119.76 39.157,122.287 39.497,122.627 v1@39.497,122.671
  SIG_BOT w0.18: R9.1@38.831,123.429 38.831,122.684 38.829,122.682 v1(39.497,122.682)
NetC1_1: C1.1 U1.29 U1.45 | length 12.1
  SIG_TOP w0.18: v1(29.591,112.522) 29.951,112.553 30.178,113.243 ccw(c29.851,113.35) 30.187,113.275 cw(c30.766,113.144) 30.376,113.592 30.857,114.012 cw(c31.163,113.661) 30.993,114.094 31.163,114.161 U1.29 ; U1.45 36.058,110.023 36.058,109.258 v1(36.068,109.248)
  SIG_BOT w0.18: v1(29.591,112.522) 30.162,112.522 ccw(c30.162,112.702) 30.178,112.523 30.564,112.557 cw(c30.617,111.965) 30.692,112.555 ccw(c30.766,113.144) 30.787,112.55 33.698,112.652 cw(c33.705,112.472) 33.831,112.6 36.068,110.363 v1(36.068,109.248)
NetC11_1: C11.1 U2.2 | length 1.9
  SIG_BOT w0.25: U2.2 39.357,104.775 39.507,104.625 39.507,104.532 40.134,103.905 C11.1
NetC21_2: C21.2 C22.2 L3.2 L4.1 | length 3.5
  SIG_TOP w0.369: L3.2 32.367,120.392 ccw(c32.249,120.741) 32.614,120.688 32.639,120.86 ; 32.627,120.78 33.249,120.448 C21.2 ; 32.668,120.85 32.639,120.86 ; C22.2 33.831,121.379 33.086,121.298 ccw(c33.126,120.932) 33.077,121.297 33.009,121.288 cw(c32.96,121.654) 32.96,121.285 L4.1 32.639,120.86
NetD1_1: D1.1 LS1.2 Q2.3 | length 6.2
  SIG_BOT w0.2: Q2.3 27.884,112.677 D1.1 28.657,114.808 29.013,115.164 29.711,115.164 30.14,114.735 LS1.2
NetD2_1: D2.1 R11.2 | length 1.4
  SIG_TOP w0.2: D2.1 27.813,112.28 R11.2
NetP1_1: P1.1 R10.1 | length 3.1
  SIG_BOT w0.5: R10.1 34.925,100.026 36.196,98.755 36.754,98.755 P1.1
NetP1_2: P1.2 Q1.3 R3.2 | length 8.6
  SIG_TOP w0.25: Q1.3@32.922,102.809 Q1.3 ; Q1.3@33.327,102.715 33.794,103.182 ccw(c26.963,109.934) 34.398,103.853 34.398,103.854 ccw(c34.204,104.011) 34.454,104.01 34.454,104.059 cw(c34.833,104.059) 34.649,104.39 ccw(c34.527,104.608) 34.777,104.608 R3.2
  SIG_TOP w0.35: Q1.3@32.922,102.809 32.93,102.804 33.106,102.708 32.997,102.676 34.798,100.874
  SIG_TOP w0.8: P1.2@34.798,98.298 34.798,100.874
NetQ2_1: Q2.1 R5.2 | length 2.1
  SIG_BOT w0.25: R5.2 28.636,108.265 Q2.1
NetR2_1: R2.1 U1.19 | length 2.2
  SIG_TOP w0.2: U1.19 34.556,116.797 34.556,117.34 35.629,118.412 ccw(c35.487,118.554) 35.644,118.429 R2.1
NRST: C10.1 R8.1 TP4.1 U1.18 | length 35.8
  SIG_TOP w0.18: U1.18 35.06,116.801 35.06,117.216 35.355,117.511 35.58,117.511 36.256,118.187 36.256,118.853 36.559,119.156 36.695,119.156 R8.1 v1(36.83,119.717) C10.1
  SIG_BOT w0.18: TP4.1@25.908,105.283 26.677,105.283 27.754,106.36 27.754,108.849 27.297,109.306 26.348,109.306 26.088,109.566 ; 26.087,109.566 cw(c26.216,109.692) 26.036,109.688 25.949,113.525 cw(c26.543,113.538) 25.949,113.546 26.035,119.562 cw(c26.215,119.559) 26.088,119.687 28.606,122.205 28.606,122.214 28.808,122.416 28.817,122.416 29.445,123.044 cw(c29.573,122.917) 29.573,123.097 30.627,123.097 35.197,123.097 cw(c35.197,122.917) 35.324,123.045 36.778,121.591 cw(c36.65,121.464) 36.83,121.464 v1(36.83,119.717)
OSC_IN: U1.26 Y1.1 | length 6.5
  SIG_TOP w0.2: Y1.1@27.346,117.099 27.432,117.185 27.432,117.856 27.5,117.924 cw(c27.642,117.783) 27.662,117.982 28.731,117.871 cw(c28.696,117.519) 28.734,117.871 ; 28.735,117.871 28.757,117.869 ; 28.758,117.868 cw(c28.736,117.67) 28.818,117.852 28.84,117.842 cw(c28.696,117.519) 29.001,117.699 ccw(c29.173,117.801) 29.037,117.655 29.146,117.554 cw(c29.01,117.407) 29.21,117.407 29.21,116.161 ccw(c29.41,116.161) 29.268,116.02 29.569,115.719 ccw(c29.71,115.861) 29.71,115.661 U1.26
OSC_OUT: U1.27 Y1.3 | length 3.2
  SIG_TOP w0.2: Y1.3@28.384,115.711 28.596,115.419 29.58,115.22 ccw(c29.71,115.861) 29.656,115.209 30.184,115.166 cw(c30.168,114.966) 30.199,115.164 ccw(c30.233,115.361) 30.233,115.161 U1.27
RFI_N: L5.1 U1.21 | length 1.5
  SIG_TOP w0.2: L5.1@33.469,118.231 33.515,118.185 33.515,118.055 33.548,118.022 U1.21
RFI_P: L5.2 U1.20 | length 1.7
  SIG_TOP w0.2: U1.20 34.048,117.673 34.14,117.765 34.14,118.214 L5.2
RFO_HP: C21.1 L2.2 L3.1 U1.23 | length 4.1
  SIG_TOP w0.2: U1.23 ccw(c32.373,116.885) 32.573,116.885 32.573,117.046 cw(c33.048,117.046) 32.576,117.099 32.639,117.663
  SIG_TOP w0.369: L3.1 32.558,118.601 32.586,118.554 cw(c32.27,118.364) L2.2 ; 32.639,117.663 L2.2 ; C21.1 33.262,119.236 33.001,119.039 ccw(c33.265,118.689) 32.834,118.77 cw(c32.472,118.839) 32.76,118.609 32.72,118.559 ccw(c33.008,118.329) 32.646,118.399 L2.2
SCLK: U1.1 U4.6 | length 14.4
  SIG_TOP w0.18: v1(38.172,110.328) 38.172,110.657 U1.1
  SIG_BOT w0.2: U4.6 30.904,119.888 30.225,119.209 30.225,118.337 31.595,116.967 32.048,116.967 cw(c32.048,116.767) 32.19,116.908 38.113,110.985 cw(c37.972,110.843) 38.172,110.843 v1(38.172,110.328)
SWCLK: TP2.1 U1.42 | length 14.4
  SIG_TOP w0.2: U1.42 34.556,110.025 34.556,109.369 v1(34.58,109.345)
  SIG_BOT w0.2: TP2.1 26.701,103.028 30.222,103.028 31.817,104.622 cw(c31.958,104.481) 31.849,104.649 32.046,104.776 ccw(c31.718,105.283) 32.187,104.903 32.578,105.386 ccw(c32.423,105.512) 32.623,105.512 32.623,108.315 33.653,109.345 v1(34.58,109.345)
SWDIO: TP3.1 U1.36 | length 10.6
  SIG_TOP w0.2: v1(29.845,108.966) 29.845,109.344 31.149,110.648 31.407,110.648 U1.36
  SIG_BOT w0.2: TP3.1 27.305,103.632 29.845,106.172 v1(29.845,108.966) ; TP3.1@25.85,103.412 TP3.1@25.913,103.476
VBAT: C14.2 P1.3 R10.2 R12.2 U3.1 U3.3 | length 16.2
  SIG_TOP w0.25: C14.2 28.791,100.584 30.344,102.137 30.344,102.8 U3.3
  SIG_TOP w0.35: 29.186,100.076 29.682,99.58 29.772,99.58 30.468,99.58
  SIG_TOP w0.5: C14.2@28.514,100.584 U3.1 ; C14.2@28.594,100.438 28.956,100.076 29.186,100.076 ; 30.468,99.58 31.54,98.508 32.048,98.508 P1.3@32.258,98.298
  SIG_BOT w0.2: R12.2 30.974,101.972 31.425,100.801 cw(c30.861,100.584) 31.442,100.747 P1.3
  SIG_BOT w0.5: P1.3 33.425,99.592 R10.2
VCP_RX: TP7.1 U1.10 | length 4.2
  SIG_TOP w0.18: U1.10 38.705,115.161 40.088,113.777 40.865,113.777 41.231,113.411 TP7.1
VCP_TX: TP6.1 U1.9 | length 4.5
  SIG_TOP w0.18: U1.9 38.188,114.649 38.603,114.649 39.788,113.464 39.788,112.719 40.747,111.76 41.021,111.76
VR_PA: C19.1 C20.1 L2.1 U1.24 | length 5.6
  SIG_TOP w0.2: C19.1 29.845,118.73 29.845,118.573 ccw(c30.045,118.574) 29.903,118.433 30.043,118.293 ccw(c30.184,118.435) 30.099,118.254 31.054,118.051 31.989,117.116 cw(c31.848,116.974) 32.003,117.101 32.048,117.046 U1.24
  SIG_TOP w0.369: C19.1 30.864,118.88 ccw(c30.863,119.249) 30.923,118.885 31.039,118.904 C20.1 ; C20.1@31.111,118.976 L2.1
pads on no net: U1.4 U1.7 U1.8 U1.13 U1.14 U1.16 U1.17 U1.22 U1.30 U1.32 U1.34 U1.39 U1.40 U1.43 U1.47 U2.5 U2.6 U3.4

## Polygon pours and split planes (outlines as drawn)
GND on GND "GND_L02_P000" (solid, pour order 0): 25.654,100.028 25.654,124.028 cw(c28.654,124.028) 28.654,127.028 38.654,127.028 cw(c38.654,124.028) 41.654,124.028 41.654,100.028 cw(c38.654,100.028) 38.654,97.028 28.654,97.028 cw(c28.654,100.028)
3v3 on VCC "3V3_L03_P001" (solid, pour order 1): 25.654,100.028 25.654,124.028 cw(c28.654,124.028) 28.654,127.028 38.654,127.028 cw(c38.654,124.028) 41.654,124.028 41.654,100.028 cw(c38.654,100.028) 38.654,97.028 28.654,97.028 cw(c28.654,100.028)

## Silkscreen, mask and mechanical layers (free items; w line width, h text height)
Top Overlay:
  text "V1.0" at 28.194,120.904 h0.8 r90
  text "PaulInOne" at 26.797,118.11 h0.8 r90
  text "+" at 31.877,100.197 h0.8
  text "PYRO" at 34.417,100.203 h0.8
  text "-" at 27.051,98.025 h0.8
Bottom Overlay:
  text "R" at 40.64,113.03 h0.8
  text "T" at 40.64,111.379 h0.8
  text "G" at 40.64,109.728 h0.8
  text "G" at 27.559,106.426 h0.8
  text "NRST" at 29.591,104.902 h0.8
  text "DIO" at 28.702,103.378 h0.8
  text "CLK" at 28.702,101.727 h0.8
  text "3v3" at 28.702,100.076 h0.8
Mechanical 11:
  lines w0.254: 25.654,100.028 ccw(c28.654,100.028) 28.654,97.028 ; 25.654,100.028 ccw(c28.654,100.028) 28.654,97.028 ; 25.654,100.028 ccw(c28.654,100.028) 28.654,97.028 ; 25.654,100.028 25.654,124.028 ; 25.654,100.028 25.654,124.028 ; 25.654,100.028 25.654,124.028 ; 25.654,124.028 cw(c28.654,124.028) 28.654,127.028 ; 25.654,124.028 cw(c28.654,124.028) 28.654,127.028 ; 25.654,124.028 cw(c28.654,124.028) 28.654,127.028 ; 28.654,97.028 38.654,97.028 ; 28.654,97.028 38.654,97.028 ; 28.654,97.028 38.654,97.028 ; 28.654,127.028 38.654,127.028 ; 28.654,127.028 38.654,127.028 ; 28.654,127.028 38.654,127.028 ; 38.654,97.028 ccw(c38.654,100.028) 41.654,100.028 ; 38.654,97.028 ccw(c38.654,100.028) 41.654,100.028 ; 38.654,97.028 ccw(c38.654,100.028) 41.654,100.028 ; 38.654,127.028 cw(c38.654,124.028) 41.654,124.028 ; 38.654,127.028 cw(c38.654,124.028) 41.654,124.028 ; 38.654,127.028 cw(c38.654,124.028) 41.654,124.028 ; 41.654,100.028 41.654,124.028 ; 41.654,100.028 41.654,124.028 ; 41.654,100.028 41.654,124.028